# Altium PCB PCB_Board1_V1 - 副本.PcbDoc
Units mm, origin at the board's own origin, x right, y up, seen from the top; angles counter-clockwise.
Board outline 152.4 x 101.6 mm, 4 copper layers (Top Layer, MidLayer2, Mid-Layer 1, Bottom Layer), stack 0.816 mm thick; 3 components, 38 nets, 45 pads, 19 vias.
Unrouted connection lines stored in the file: 3.
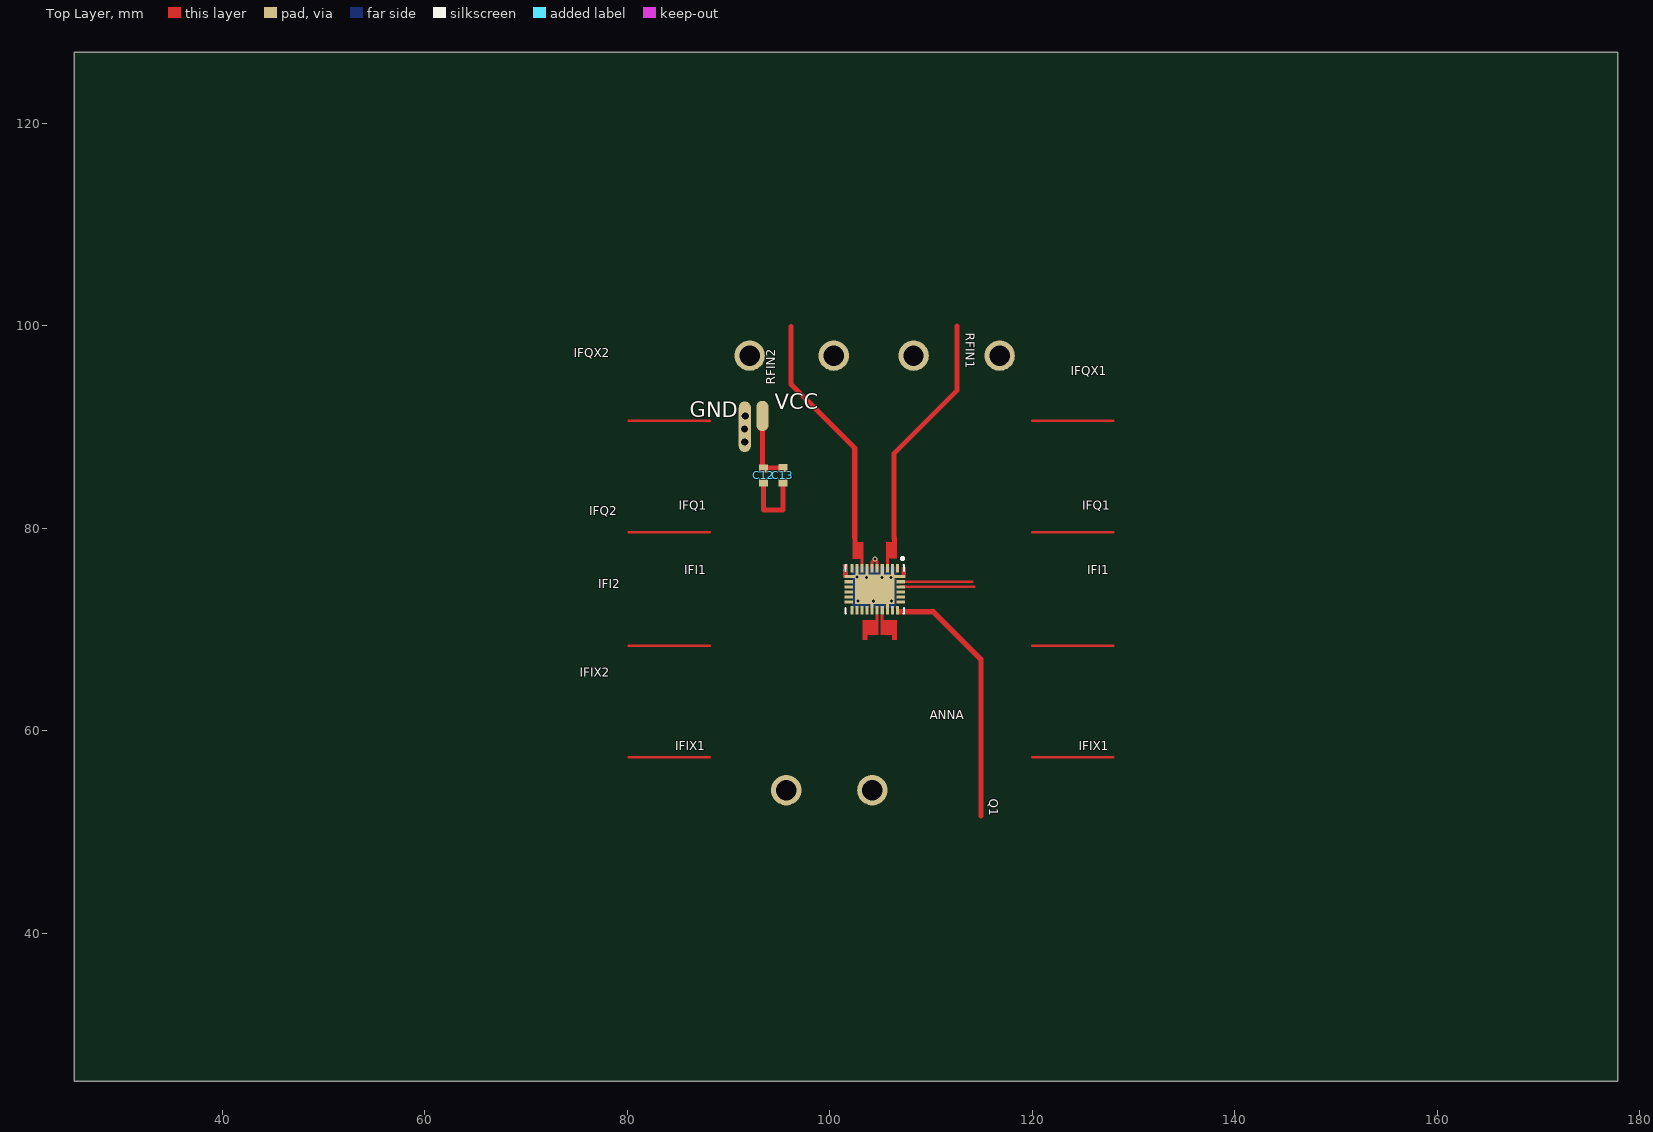
[diagram p0: Top Layer view]
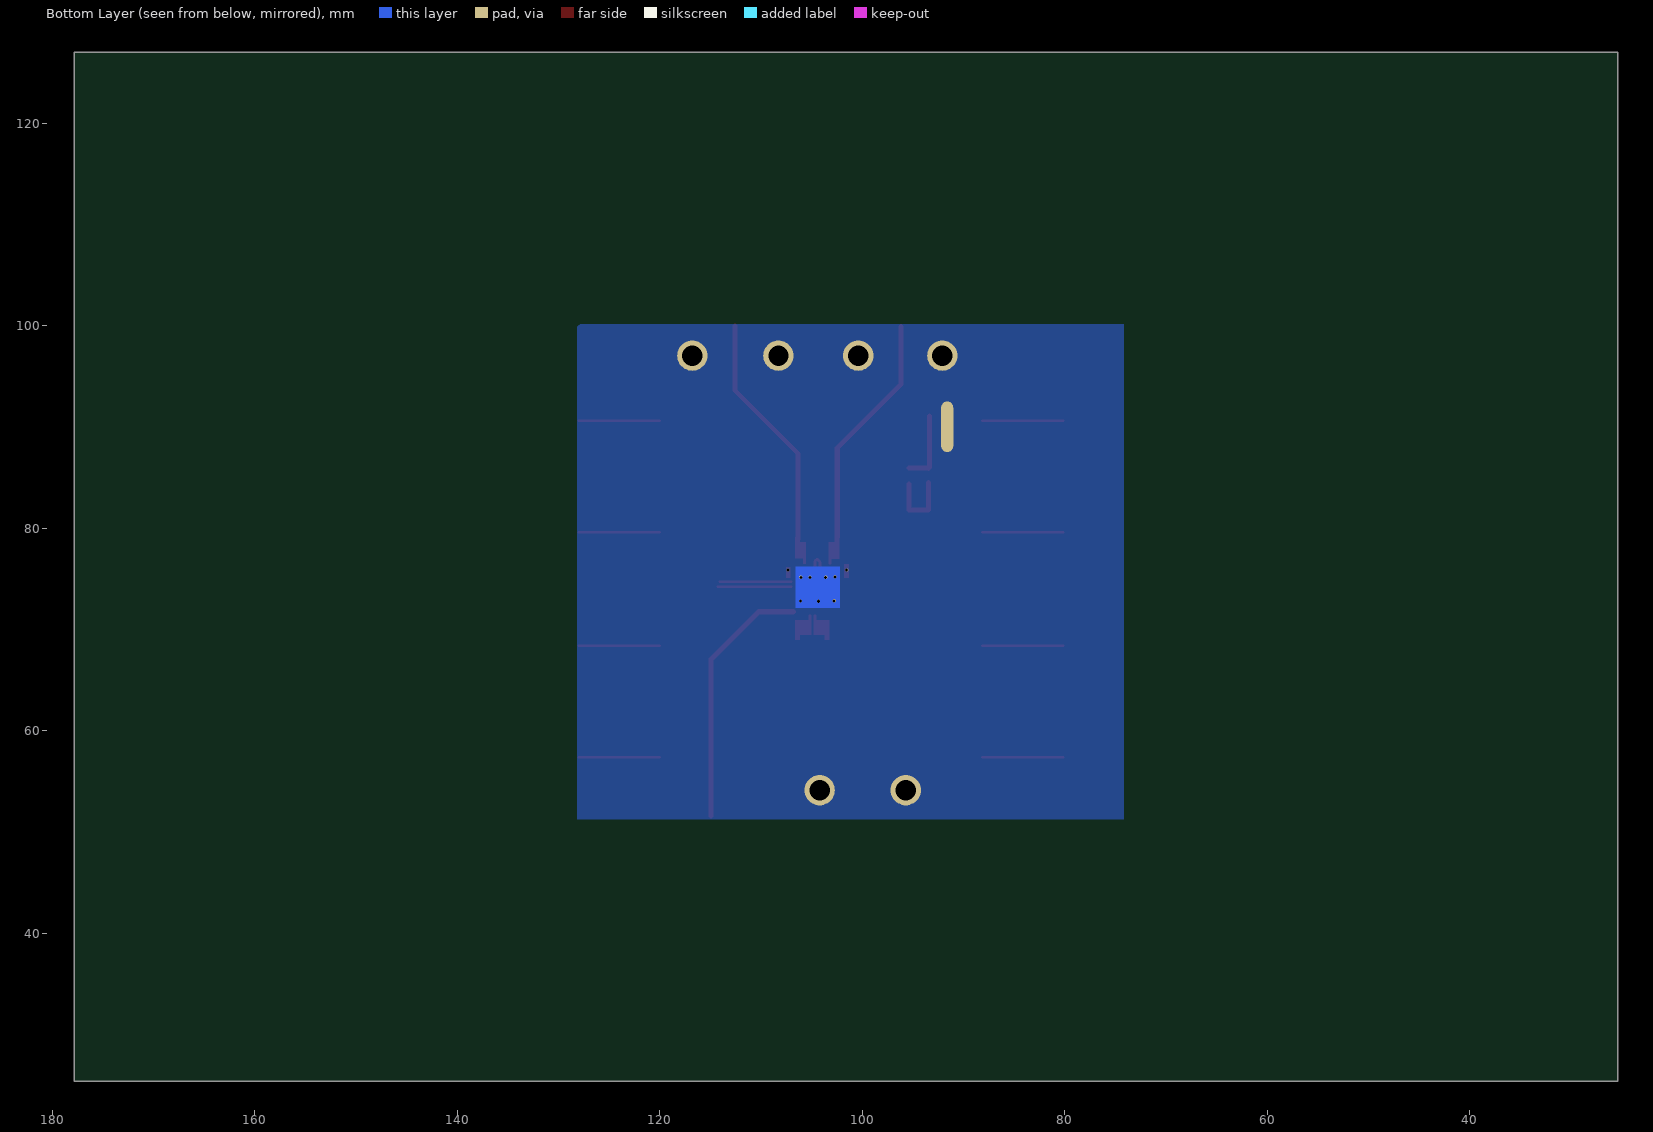
[diagram p1: Bottom Layer view, seen from below]
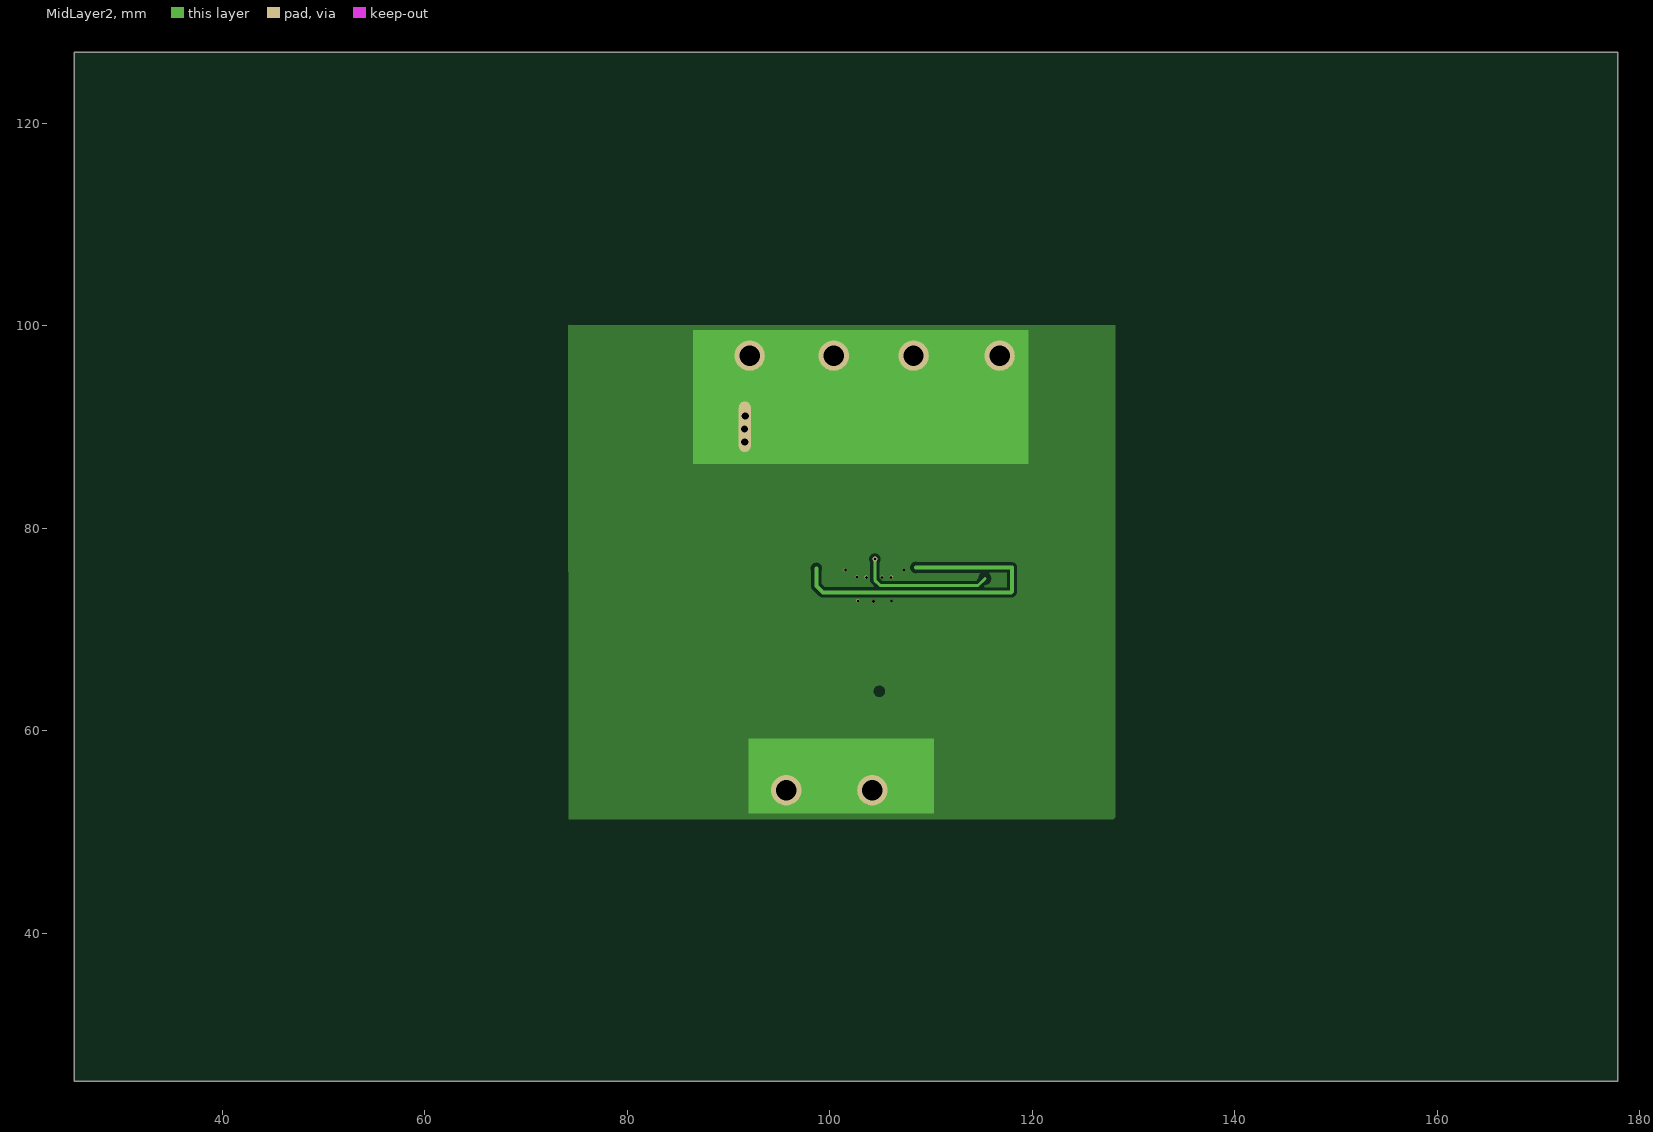
[diagram p2: MidLayer2]
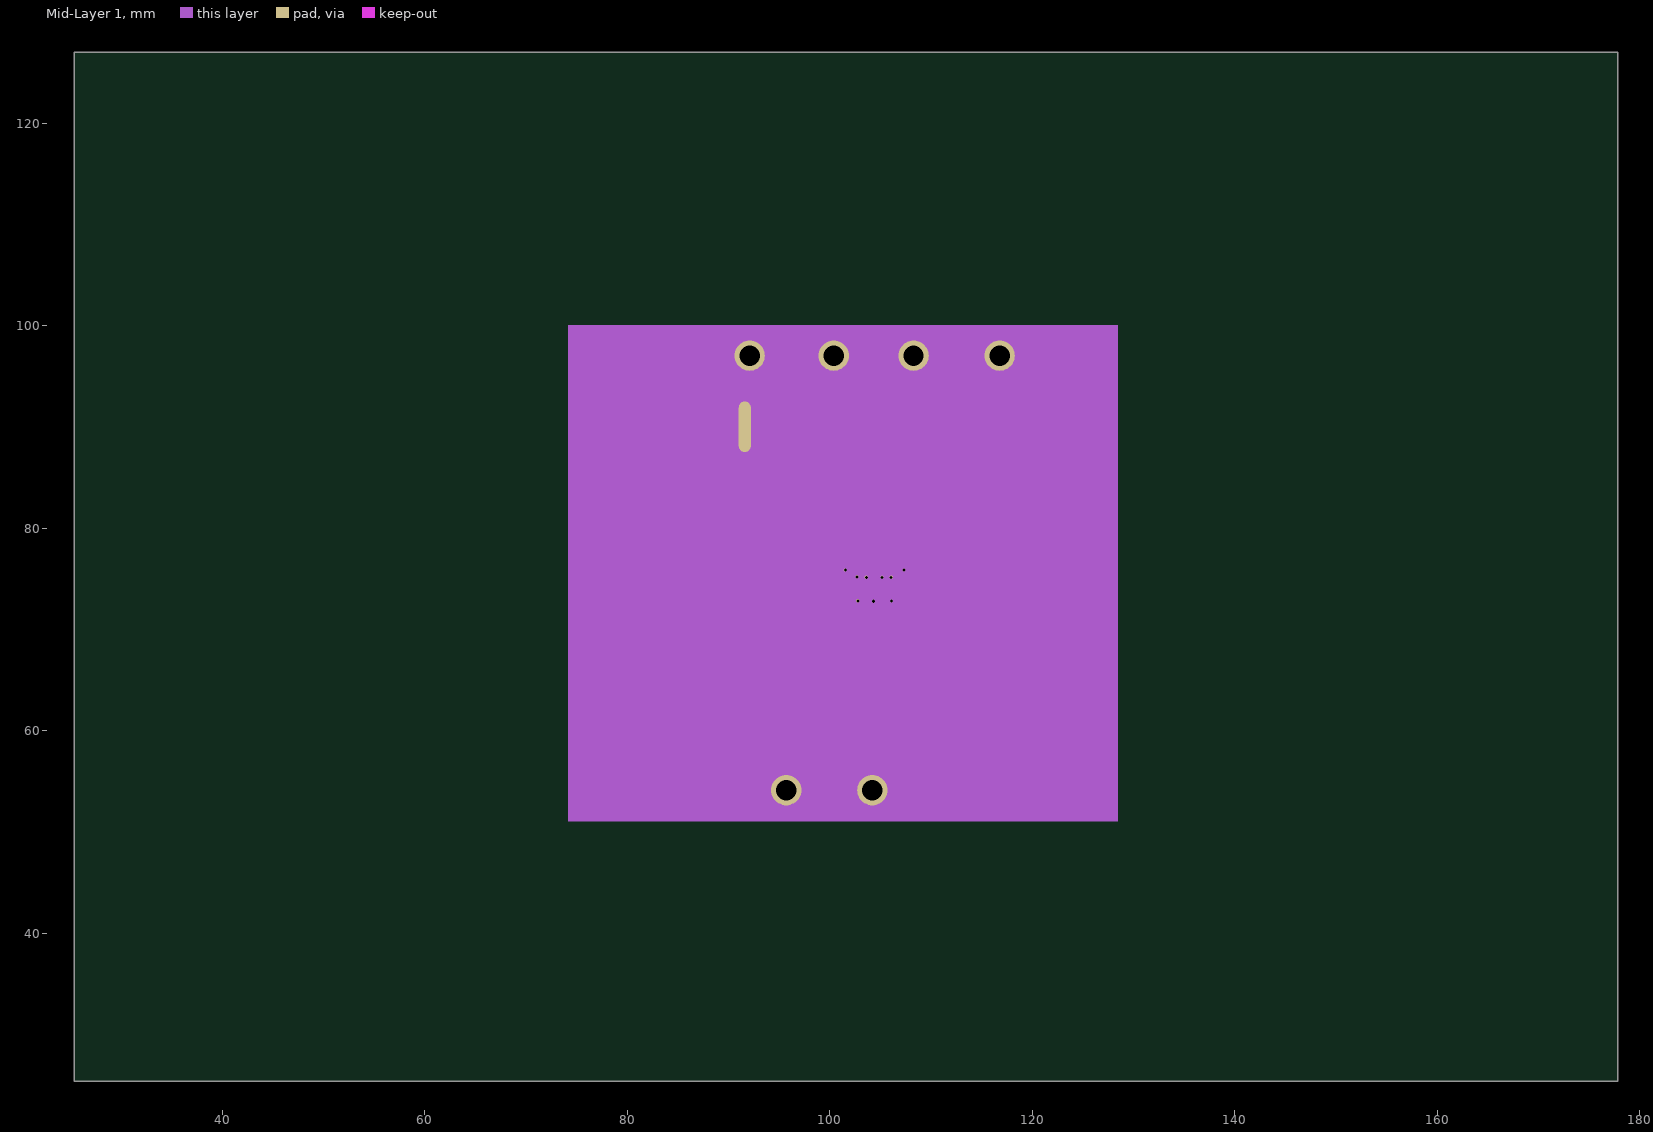
[diagram p3: Mid-Layer 1]

## Layer stack, top to bottom
Top Layer: signal copper 0.0356
Dielectric: core 0.254, RO4350, Dk 3.66
MidLayer2: signal copper 0.0356
Dielectric: prepreg 0.32, FR-4, Dk 4.8
Mid-Layer 1: signal copper 0.0356
Dielectric: core 0.1, FR-4, Dk 3.55
Bottom Layer: signal copper 0.0356

## Board outline
25.4,25.4 177.8,25.4 177.8,127 25.4,127

## Design rules (kind name [scope] priority, off if disabled: settings)
AssemblyTestPointUsage [All] p1 off:
AssemblyTestpoint [All] p1 off: testpointundercomponent=TRUE minsize=1.016 maxsize=2.54 preferedsize=1.524 minholesize=0 maxholesize=1.016 preferedholesize=0.813 testpointgrid=0.025 usegrid=TRUE gridtolerance=0 allowsidetop=TRUE allowsidebottom=TRUE
Clearance [All] p1 off: gap=0.3
ComponentClearance [All] p1 off: gap=0.254 collisioncheckmode=3 verticalgap=0.254 showdistances=FALSE
DiffPairsRouting DiffPair_DiffPairsRouting [InDifferentialPair ('IFIX')] p1: maxlimit=0.254 minlimit=0.254 mostfreqgap=0.254 maxuncoupledlength=12.7
DiffPairsRouting DiffPair_DiffPairsRouting_1 [InDifferentialPair ('IFI')] p2: maxlimit=0.254 minlimit=0.254 mostfreqgap=0.254 maxuncoupledlength=12.7
DiffPairsRouting DiffPair_DiffPairsRouting_2 [InDifferentialPair ('IFQX')] p3: maxlimit=0.254 minlimit=0.254 mostfreqgap=0.254 maxuncoupledlength=12.7
DiffPairsRouting DiffPair_DiffPairsRouting_1_1 [InDifferentialPair ('IFQX')] p4: maxlimit=0.254 minlimit=0.254 mostfreqgap=0.254 maxuncoupledlength=12.7
DiffPairsRouting [All] p5 off: maxlimit=0.254 minlimit=0.254 mostfreqgap=0.254 maxuncoupledlength=12.7
FabricationTestPointUsage [All] p1 off: valid=0 allowmultiple=FALSE
FabricationTestpoint [All] p1 off: side=3 testpointundercomponent=TRUE minsize=1.016 maxsize=2.54 preferedsize=1.524 minholesize=0 maxholesize=1.016 preferedholesize=0.813 testpointgrid=0.025 allowsidetop=TRUE allowsidebottom=TRUE usegrid=TRUE gridtolerance=0
FanoutControl Fanout_BGA [IsBGA] p1 off: bgadir=Out bgaviamode=Centered fanoutstyle=Auto fanoutdirection=Alternating viagrid=0.025 // Fanout_BGA (Default Rule)
FanoutControl Fanout_LCC [IsLCC] p2 off: bgadir=Out bgaviamode=Centered fanoutstyle=Auto fanoutdirection=Alternating viagrid=0.025 // Fanout_LCC (Default Rule)
FanoutControl Fanout_SOIC [IsSOIC] p3 off: bgadir=Out bgaviamode=Centered fanoutstyle=Auto fanoutdirection=Alternating viagrid=0.025 // Fanout_SOIC (Default Rule)
FanoutControl Fanout_Small [(CompPinCount < 5)] p4 off: bgadir=Out bgaviamode=Centered fanoutstyle=Auto fanoutdirection=OutThenIn viagrid=0.025 // Fanout_Small (Default Rule)
FanoutControl Fanout_Default [All] p5 off: bgadir=Out bgaviamode=Centered fanoutstyle=Auto fanoutdirection=Alternating viagrid=0.025 // Fanout_Default (Default Rule)
Height [All] p1 off: minheight=0 maxheight=25.4 prefheight=12.7
HoleSize [All] p1 off: absolutevalues=TRUE maxlimit=2.54 minlimit=0.025 maxpercent=80.000 minpercent=20.000
HoleToHoleClearance [All] p1 off: gap=0.254 allowstackedmicrovias=TRUE
LayerPairs [All] p1 off: enforce=TRUE
MatchedLengths DiffPair_MatchedLengths [InDifferentialPair ('IFIX')] p1: tolerance=25.4 checknetsindiffpair=TRUE checkdiffpairvsdiffpair=TRUE checkothers=TRUE
MatchedLengths DiffPair_MatchedLengths_1 [InDifferentialPair ('IFI')] p2: tolerance=25.4 checknetsindiffpair=TRUE checkdiffpairvsdiffpair=TRUE checkothers=TRUE
MatchedLengths DiffPair_MatchedLengths_2 [InDifferentialPair ('IFQX')] p3: tolerance=25.4 checknetsindiffpair=TRUE checkdiffpairvsdiffpair=TRUE checkothers=TRUE
MatchedLengths DiffPair_MatchedLengths_1_1 [InDifferentialPair ('IFQX')] p4: tolerance=25.4 checknetsindiffpair=TRUE checkdiffpairvsdiffpair=TRUE checkothers=TRUE
MinimumSolderMaskSliver [All] p1 off: minsoldermaskwidth=0.254
NetAntennae [All] p1 off: netantennaetolerance=0
PasteMaskExpansion [All] p1 off: expansion=0
PlaneClearance [All] p1 off: clearance=0.508
PlaneConnect [All] p1 off: planeconnectstyle=Relief reliefexpansion=0.508 reliefentries=4 reliefconductorwidth=0.254 reliefairgap=0.254
PolygonConnect GND-Via [ispad] p1 off: connectstyle=Direct reliefconductorwidth=0.254 reliefentries=4 polygonreliefangle="90 Angle" airgapwidth=0.254
PolygonConnect [All] p2: connectstyle=NoConnect reliefconductorwidth=0.254 reliefentries=4 polygonreliefangle="90 Angle" airgapwidth=0.254
RoutingCorners [All] p1 off: cornerstyle=45-Degree minsetback=2.54 maxsetback=2.54
RoutingLayers [All] p1 off: top layer_v5=TRUE mid layer 1_v5=TRUE mid layer 2_v5=TRUE bottom layer_v5=TRUE
RoutingPriority [All] p1 off: routingpriority=0
RoutingTopology [All] p1 off: topology=Shortest
RoutingVias [All] p1 off: holewidth=0.711 width=1.27 viastyle="Through Hole" minholewidth=0.711 minwidth=1.27 maxholewidth=0.711 maxwidth=1.27
ShortCircuit [All] p1 off: allowed=FALSE
SilkToSilkClearance [All] p1 off: silktosilkclearance=0.254
SilkToSolderMaskClearance [IsPad] p1 off: minsilkscreentomaskgap=0.254 clearancetoexposedcopper=TRUE
SolderMaskExpansion [All] p1 off: expansion=0.2
UnRoutedNet [All] p1 off:
Width DiffPair_Width [InDifferentialPair('IFIX')] p1: maxlimit=0.254 minlimit=0.254 preferedwidth=0.254
Width DiffPair_Width_1 [InDifferentialPair('IFI')] p2: maxlimit=0.254 minlimit=0.254 preferedwidth=0.254
Width DiffPair_Width_2 [InDifferentialPair('IFQX')] p3: maxlimit=0.254 minlimit=0.254 preferedwidth=0.254
Width DiffPair_Width_1_1 [InDifferentialPair('IFQX')] p4: maxlimit=0.254 minlimit=0.254 preferedwidth=0.254
Width [All] p5 off: maxlimit=0.254 minlimit=0.254 preferedwidth=0.254

## Classes and differential pairs
component class 24GSchematic: U*1
differential pair IFI: +IFI_N -IFI_P
differential pair IFIX: +IFIX_N -IFIX_P

## Components (designator, comment, footprint, x,y, rotation, side; value= is the part's Value field where it differs from the comment)
C12 "Cap Semi" 1608[0603] 93.472,85.217 r90 top
C13 "Cap Semi" 1608[0603] 95.366,85.234 r90 top
? "Comment" QFN50P540X440X90_HS-33N 104.431,73.972 r270 top

## Footprints (in the part's own frame and the unit in brackets; to place one, negate y for a bottom-side part, rotate by r counter-clockwise, add the part's x,y. Pads: shape width x height; smd on the part's side, far side on the other; paste and mask are expansions set on the pad)
1608[0603] [mm] "Chip Capacitor, Body 1.6x0.8mm, IPC High Density"
  rect 0.8x0.9 smd: 1(-0.7,0) 2(0.7,0)
  body extent -0.87,-0.48 0.87,0.48, height 1.3
QFN50P540X440X90_HS-33N [mm] "QFN, 32-Leads, Body 5.40x4.40mm, Pitch 0.50mm, Thermal Pad 3.90x2.90mm, IPC Medium Density"
  rect 0.85x0.3 smd: 1(-2.075,2.25) 3(-2.075,1.25) 5(-2.075,0.25) 6(-2.075,-0.25) 8(-2.075,-1.25) 10(-2.075,-2.25) 17(2.075,-2.25) 18(2.075,-1.75) 19(2.075,-1.25) 20(2.075,-0.75) 22(2.075,0.25) 23(2.075,0.75) 25(2.075,1.75) 26(2.075,2.25)
  rect 1.25x0.3 smd: 2(-1.875,1.75) 4(-1.875,0.75) 7(-1.875,-0.75) 9(-1.875,-1.75) 21(1.875,-0.25) 24(1.875,1.25)
  rect 0.3x1.25 smd: 11(-1.25,-2.375) 32(-1.25,2.375)
  rect 0.3x0.85 smd: 12(-0.75,-2.575) 13(-0.25,-2.575) 14(0.25,-2.575) 15(0.75,-2.575) 16(1.25,-2.575) 27(1.25,2.575) 28(0.75,2.575) 29(0.25,2.575) 30(-0.25,2.575) 31(-0.75,2.575)
  rect 2.9x3.9 smd: 33(0,0)
  silkscreen extent -3.17,-2.9 2.4,2.9, body extent -2.25,-2.75 2.25,2.75, height 0.9

## Part data
C12 C13: "Capacitor (Semiconductor SIM Model)"

## Free pads (board coordinates)
  oval 1.2x5 all layers, no hole: 0(91.606,90.022)
  oval 1.2x3 smd: 0(93.344,91.092)
  round 3 all layers, no hole paste+0 mask+0: 1(92.088,97.047) 1(95.699,54.138) 1(100.388,97.047) 1(104.199,54.138) 1(108.272,97.047) 1(116.772,97.047)

## Via types
v1: diameter 0.33, hole 0.3, Top Layer to Bottom Layer, 9 vias
v2: diameter 2, hole 2, Top Layer to Bottom Layer, 6 vias
v3: diameter 0.9, hole 0.7, Top Layer to MidLayer2, 3 vias
v4: diameter 0.5, hole 0.3, Top Layer to MidLayer2, 1 vias

## Nets (pads, with @x,y where several pads share a name; then routed paths per layer and width w, separated by ;. In a path a pad name is that pad's centre, name@x,y a point inside that pad or via, vN(x,y) a via of type N, cw(c..) or ccw(c..) an arc to the next point about the centre after c; other vN are vias at no path point)
3V: 
GND: ?.33 pad.0@91.606,90.022
  other v1: 104.32,72.796 106.086,72.826 102.772,72.836 103.608,75.156 105.162,75.154 106.058,75.154 102.686,75.2 101.528,75.876 107.334,75.876
  other v3: 91.606,88.5 91.564,89.788
IFI_N: ?.31 | length 7.1
  Top Layer w0.254: ?.31 114.067,74.722
IFI_P: ?.30 | length 7.3
  Top Layer w0.254: ?.30 111.74,74.222 111.748,74.214 114.277,74.214
IFIX_N: ?.14
IFIX_P: ?.15
IFQ_N: 
IFQ_P: 
IFQX_N: ?.12
IFQX_P: ?.13
NetC1_2: 
NetC4_1: 
NetC5_1: 
NetC5_2: 
NetC6_2: 
NetC7_2: 
NetC8_2: 
NetC10_1: 
NetC11_1: 
NetC12_2: C12.2 C13.2 pad.0@93.344,91.092 | length 47.6
  Top Layer w0.5: pad.0@93.344,91.092 93.344,86.045 C12.2 93.489,85.934 C13.2 ; 93.472,84.517 93.472,81.788 95.377,81.788 95.377,84.39
  MidLayer2 w0.4: 98.679,76.032 98.679,74.295 99.26,73.714 99.278,73.714 99.316,73.676 117.908,73.676 117.983,73.751 117.983,76.126 108.492,76.126
NetC14_2: 
NetR2_1: 
NetR3_1: 
NetR7_1: 
NetU1_5:  | length 25.5
  Top Layer w0.53: 106.807,71.755 110.236,71.755 114.935,67.056 114.935,51.623
NetU1_12: 
NetU1_14: 
NetU1_15: 
NetU1_16: 
NetU1_17: 
NetU4_1: 
NetU4_2: 
NetU4_3: 
NetU4_4: 
NetU4_5: 
RFIN_N: 
RFIN_P: 
VCC: ?.1 ?.10
pads on no net: ?.2 ?.3 ?.4 ?.5 ?.6 ?.7 ?.8 ?.9 ?.11 ?.16 ?.17 ?.18 ?.19 ?.20 ?.21 ?.22 ?.23 ?.24 ?.25 ?.26 ?.27 ?.28 ?.29 ?.32 C12.1 C13.1
copper on no net: | length 126.5
  Top Layer w0.254: 80.162,57.379 88.162,57.379 ; 80.162,68.402 88.162,68.402 ; 80.162,79.6 88.162,79.6 ; 80.162,90.627 88.162,90.627 ; 120,57.379 128,57.379 ; 120,68.402 128,68.402 ; 120,79.6 128,79.6 ; 120,90.627 128,90.627
  Top Layer w0.3: 104.181,76.047 104.181,76.693 v4(104.45,76.962) 104.681,76.731 104.681,76.047
  Top Layer w0.5: 96.19,99.898 96.19,94.204 102.464,87.93 102.464,79.078 ; 106.324,78.969 106.324,87.368 106.426,87.47 112.548,93.592 112.548,99.96
  MidLayer2 w0.3: v4(104.45,76.962) 104.45,74.874 104.982,74.342 114.638,74.342 115.322,75.026
  other v2: 95.699,54.138 104.199,54.138 92.088,97.047 100.388,97.047 108.272,97.047 116.772,97.047
  other v3: 91.65,91.092

## Polygon pours and split planes (outlines as drawn)
GND on MidLayer2 "Bottom Layer-No Net" (solid, pour order 29): 74.182,100.196 74.318,100.061 128.188,100.061 128.188,51.469 127.998,51.28 74.24,51.28
no net on Bottom Layer "Bottom Layer-No Net 1" (solid, pour order 4): 127.928,100.112 128.154,99.877 128.154,51.247 74.195,51.247 74.084,51.132 74.195,51.247 74.195,100.156 127.819,100.156 127.93,100.041

## Other copper
Top Layer:
  rectangle: 105.53,76.472 105.83,77.018
  rectangle: 103.024,76.441 103.322,76.991
  rectangle: 106.131,78.664 106.631,79.168
  rectangle: 102.222,78.637 102.722,79.141
  rectangle: 105.531,77.014 106.631,78.664
  rectangle: 102.222,76.987 103.322,78.637
  rectangle net GND: 107.102,75.076 107.528,76.198
  rectangle net GND: 101.326,75.076 101.778,76.486
  rectangle: 105.029,70.926 105.327,71.476
  rectangle: 104.529,70.93 104.829,71.48
  rectangle: 106.151,68.946 106.651,69.454
  rectangle: 103.207,68.948 103.707,69.456
  rectangle: 105.029,69.454 106.651,70.928
  rectangle: 103.207,69.456 104.829,70.93
Mid-Layer 1:
  rectangle: 74.158,51.026 128.434,100.086
MidLayer2:
  rectangle net GND: 86.486,86.326 119.626,99.582
  rectangle net GND: 91.996,51.828 110.282,59.254
Bottom Layer:
  rectangle: 102.192,72.12 106.582,76.224

## Silkscreen, mask and mechanical layers (free items; w line width, h text height)
Top Overlay:
  text "RFIN1" at 113.134,99.326 h1.5 r270
  text "IFQX2" at 74.732,96.574 h1.5
  text "IFQX1" at 123.778,94.79 h1.5
  text "RFIN2" at 94.902,94.192 h1.5 r90
  text "VCC" at 94.58,91.744 h1.52
  text "GND" at 86.18,90.98 h1.52
  text "IFQ1" at 85.104,81.51 h1.5
  text "IFQ1" at 124.942,81.51 h1.5
  text "IFQ2" at 76.251,81.001 h1.5
  text "IFI1" at 85.606,75.15 h1.5
  text "IFI1" at 125.444,75.15 h1.5
  text "IFI2" at 77.14,73.787 h1.5
  text "IFIX2" at 75.311,65.049 h1.5
  text "ANNA" at 109.86,60.866 h1.5
  text "IFIX1" at 84.724,57.785 h1.5
  text "IFIX1" at 124.562,57.785 h1.5
  text "Q1" at 115.436,53.3 h1.5 r270